# Altium PCB PCB1.PcbDoc
Units mil, origin at the board's own origin, x right, y up, seen from the top; angles counter-clockwise.
Board outline 2425 x 2875 mil, 2 copper layers (Top Layer, Bottom Layer); 20 components, 17 nets, 89 pads, 0 vias.
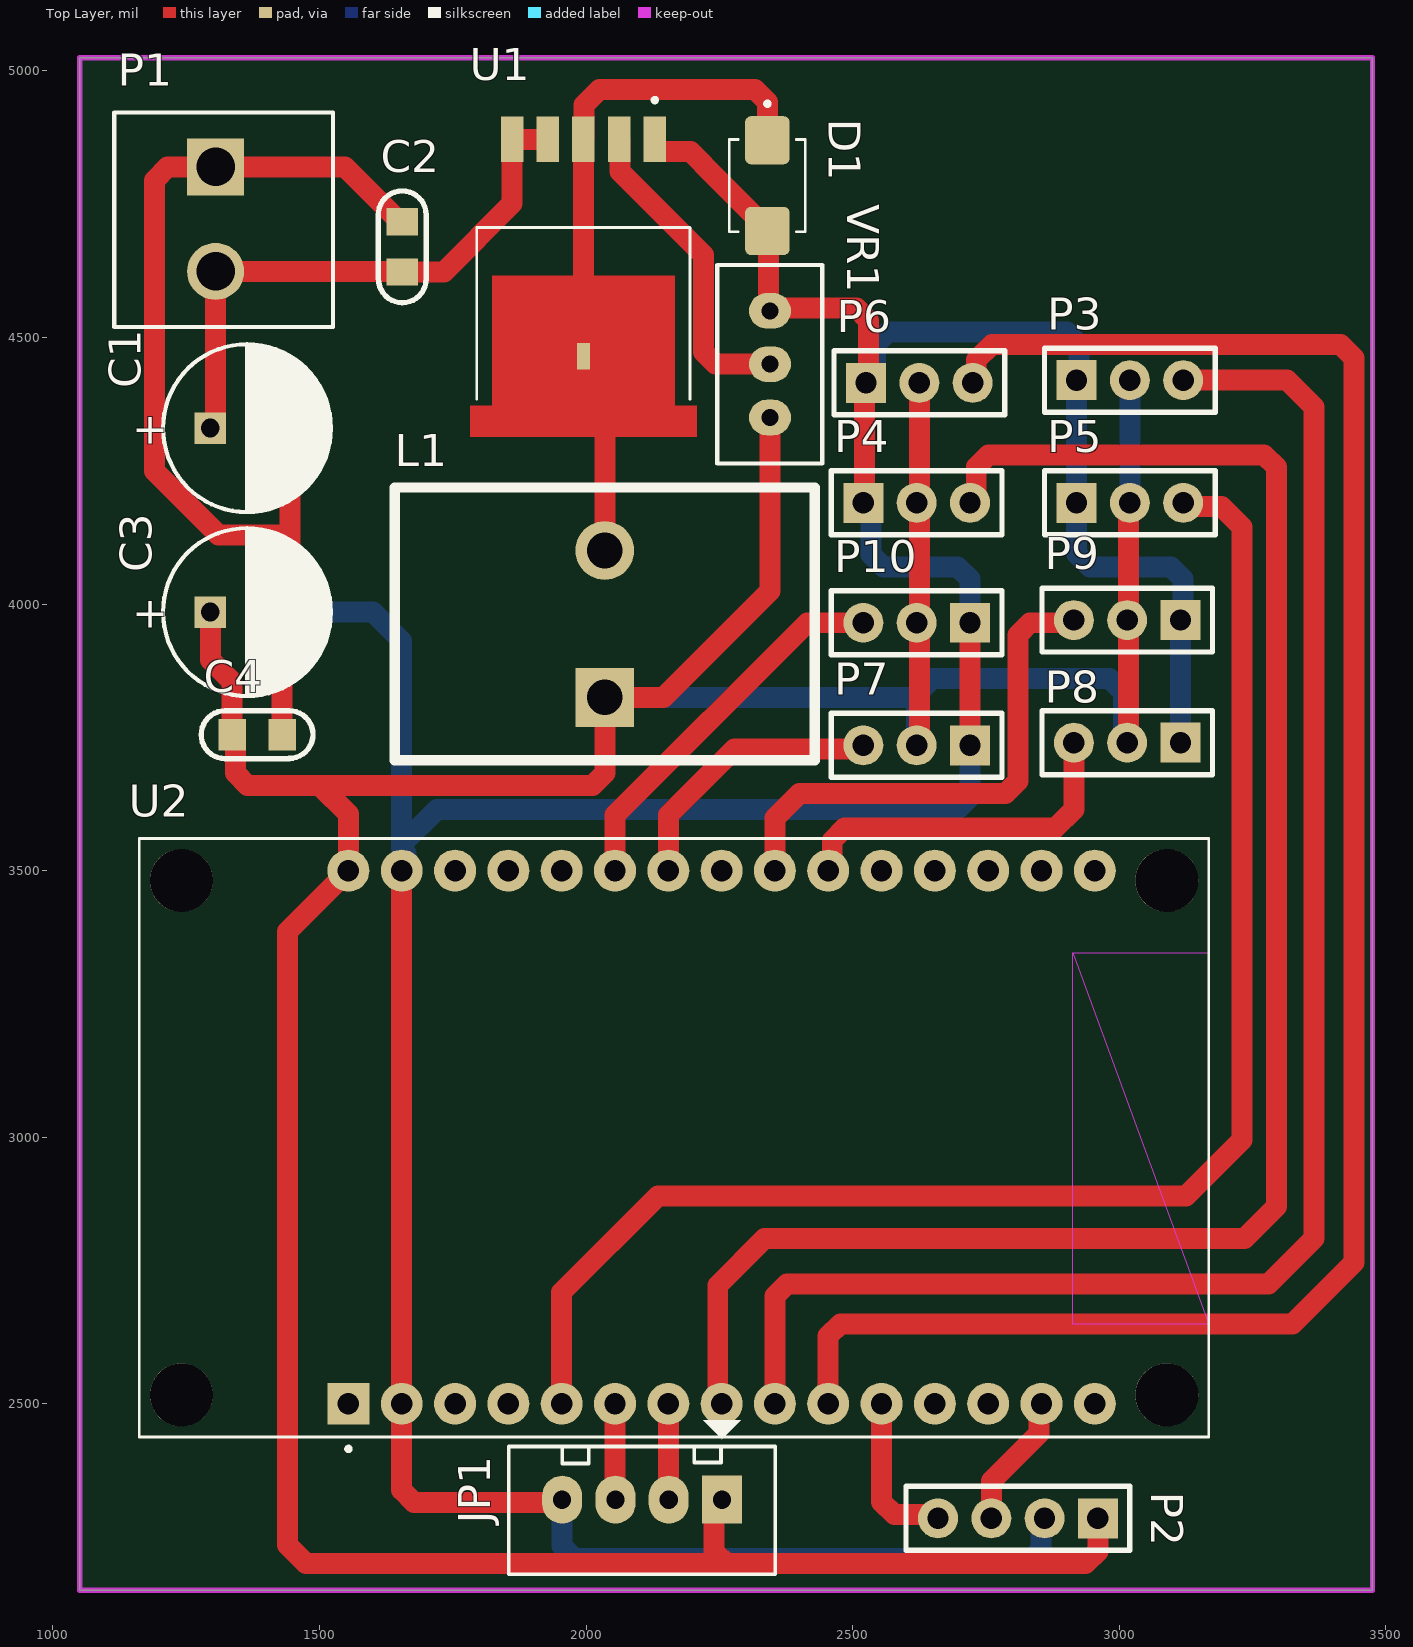
[diagram p0: Top Layer view]
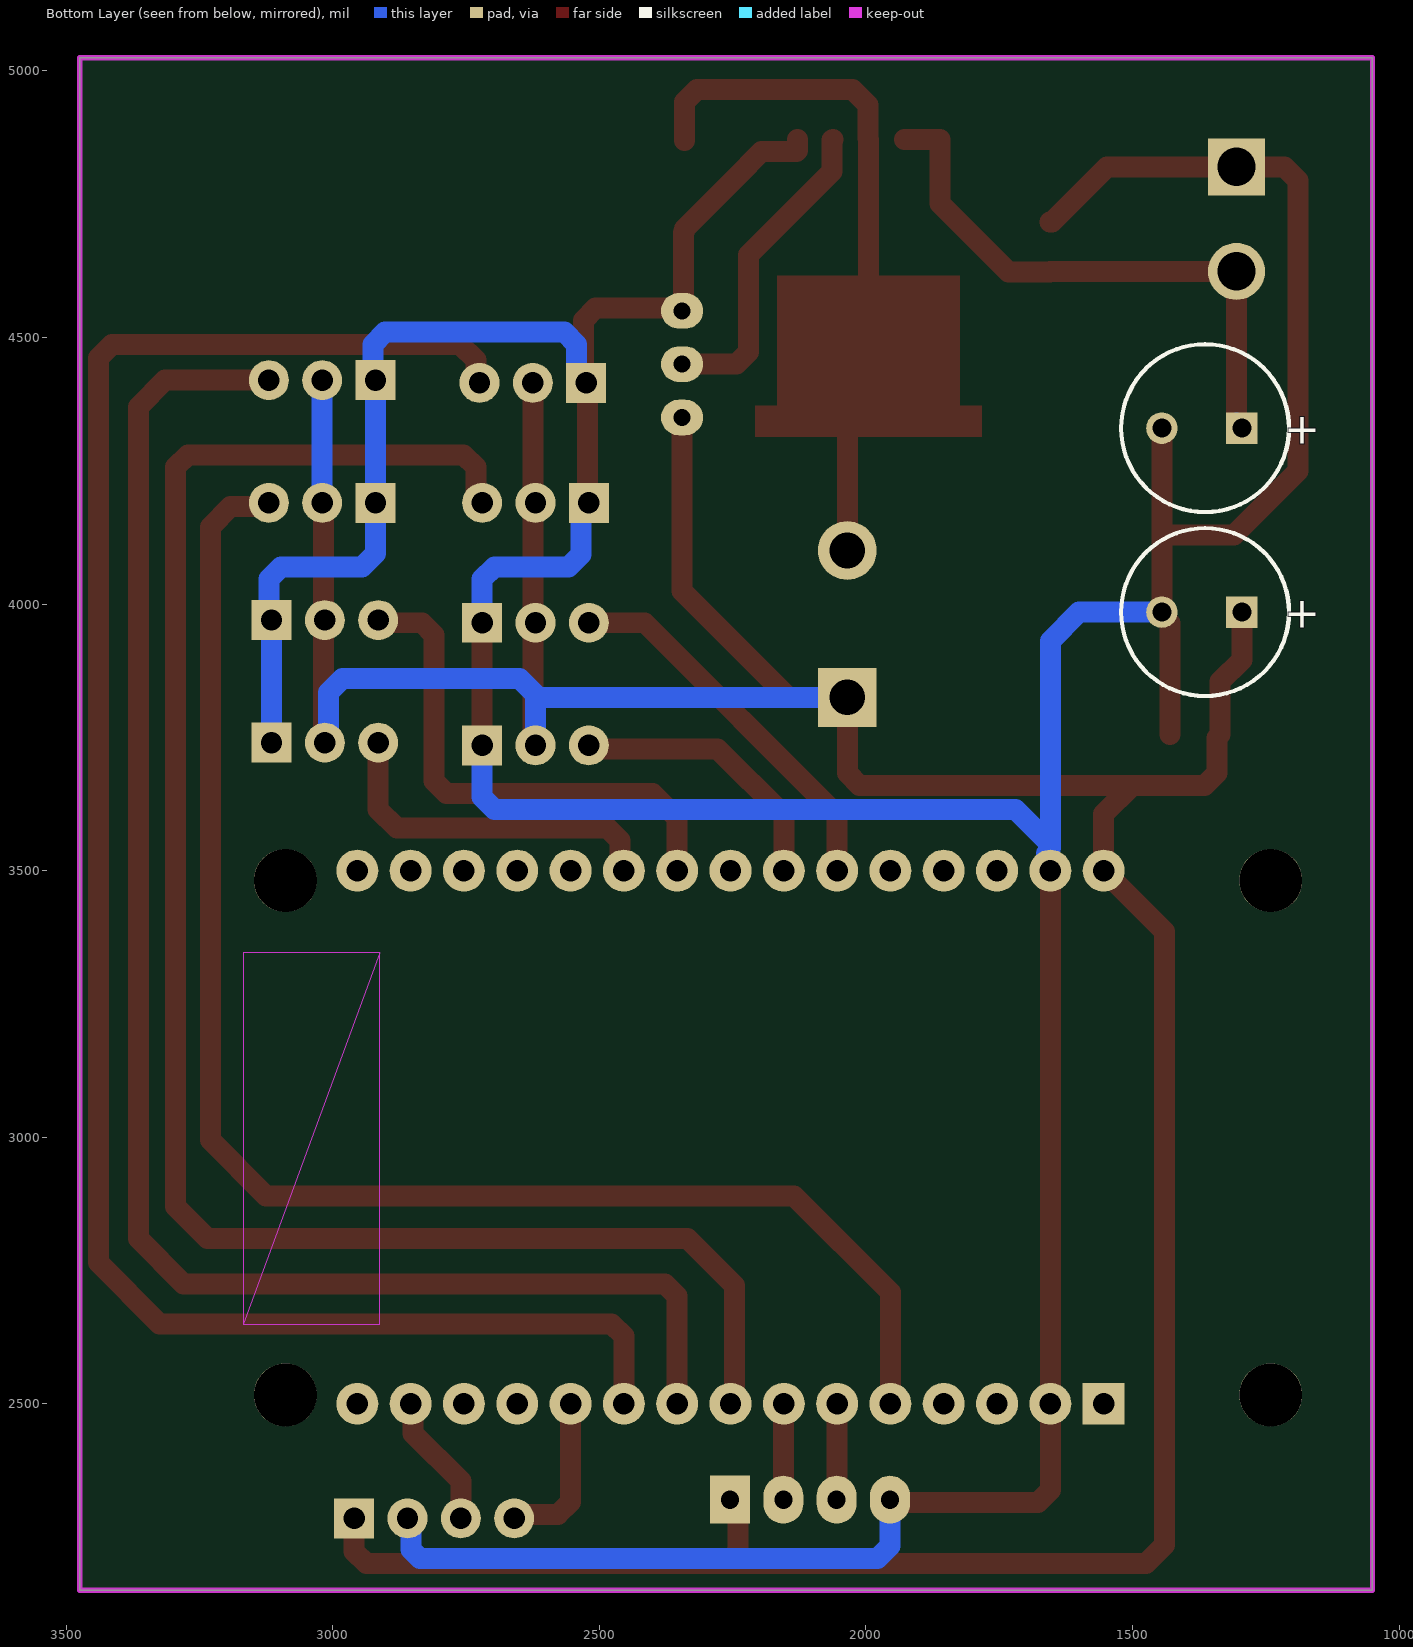
[diagram p1: Bottom Layer view, seen from below]
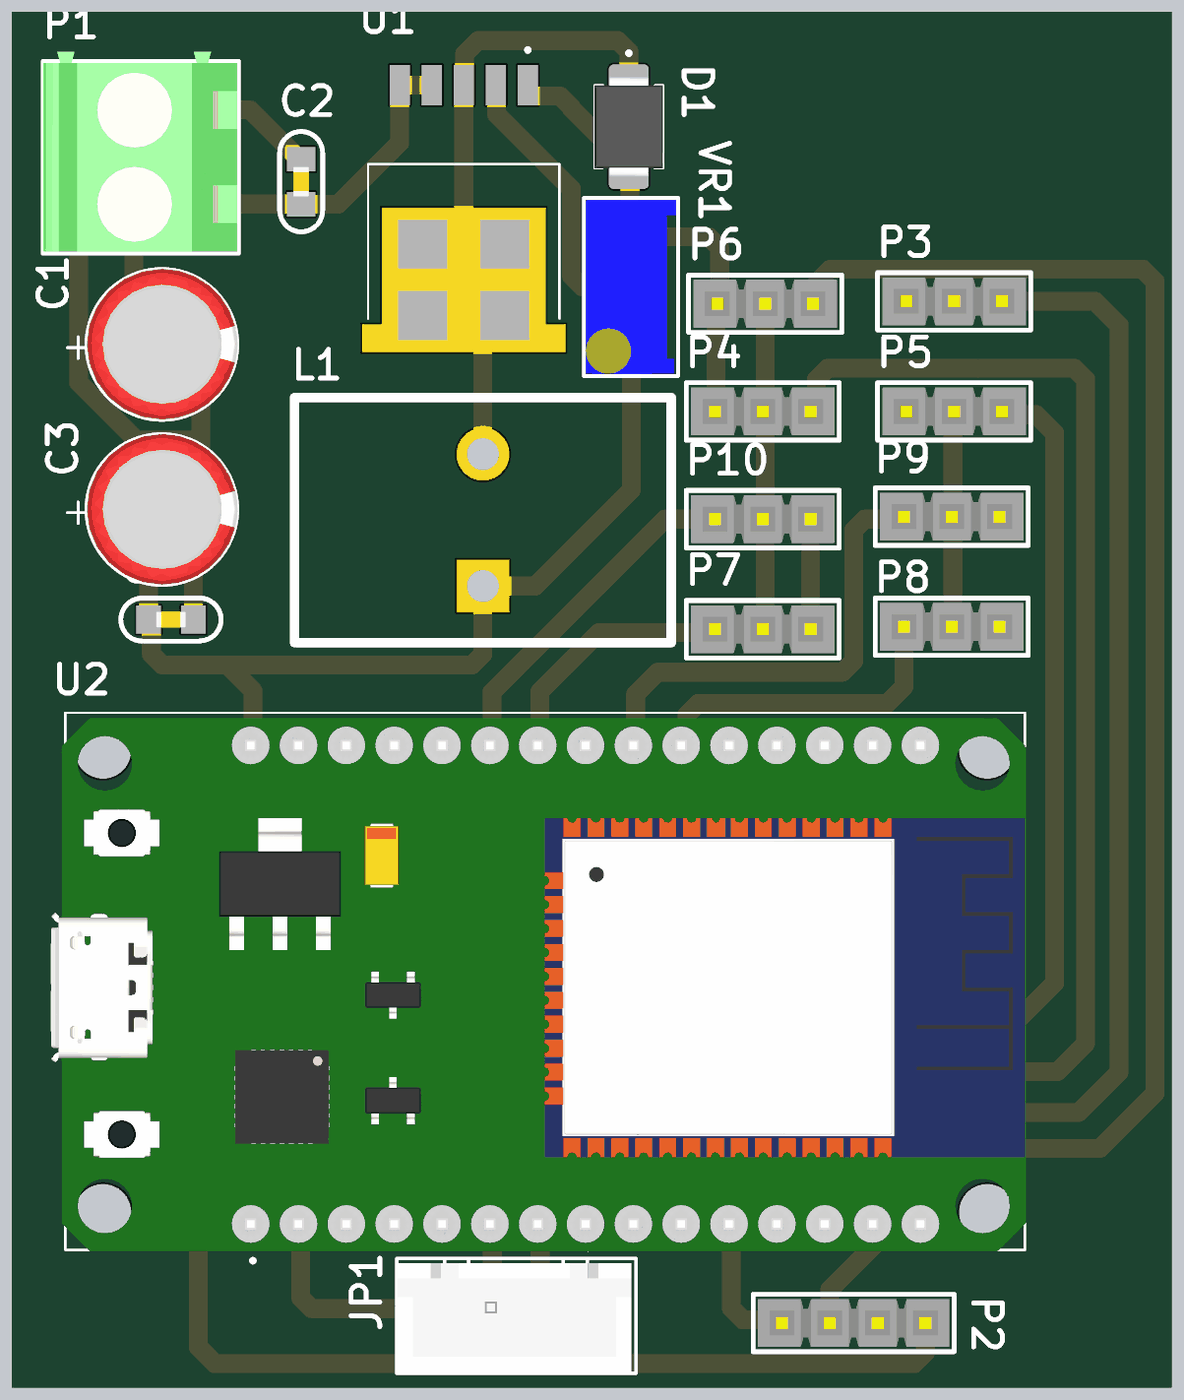
[diagram p2: 3D render of the assembled board from above, using the file's embedded part models]

## Layer stack, top to bottom
Top Solder: solder mask 0.4, Solder Resist, Dk 3.5
Top Layer: signal copper 1.4
Dielectric 1: dielectric 12.6, FR-4, Dk 4.8
Bottom Layer: signal copper 1.4
Bottom Solder: solder mask 0.4, Solder Resist, Dk 3.5

## Board outline
1050,2150 1050,5025 3475,5025 3475,2150

## Design rules (kind name [scope] priority, off if disabled: settings)
Clearance [All] p1: gap=10 ignorepadtopadclearanceinfootprint=FALSE
PolygonConnect [All] p1: connectstyle=Relief reliefconductorwidth=10 reliefentries=4 polygonreliefangle="90 Angle" airgapwidth=10
RoutingVias [All] p1: holewidth=28 width=50 viastyle="Through Hole" minholewidth=28 minwidth=50 maxholewidth=28 maxwidth=50
SolderMaskExpansion [All] p1: expansion=4 istentingtop=FALSE
Width [All] p1: maxlimit=47.24 minlimit=39.37 preferedwidth=39.37 minimp=50.000000 maximp=50.000000 favimp=50.000000
30 further rules are at their usual default settings.

## Components (designator, comment, footprint, x,y, rotation, side; value= is the part's Value field where it differs from the comment)
C1 "Cap Pol" "RADIAL E" 1295,4330 r0 top value=470
C2 "Cap Non-pol" C-NP-0805 1655,4670 r270 top value=0.1
C3 "Cap Pol" "RADIAL E" 1295,3985 r0 top value=470
C4 "Cap Non-pol" C-NP-0805 1383,3755 r0 top value=0.1
D1 "SS24" DIOM5336X265N 2340,4785 r270 top
JP1 "JP4" CON4 2255,2320 r180 top value="Connector 4"
L1 "33" "Cuon day ferrite" 2035,4100.59 r270 top
P1 "Header 2" "TBlock 2" 1305,4820 r270 top
P2 "Header 4" "Header 4" 2960,2285 r180 top
P3 "Header 3" "Header 3" 2920,4420 r0 top
P4 "Header 3" "Header 3" 2520,4190 r0 top
P5 "Header 3" "Header 3" 2920,4190 r0 top
P6 "Header 3" "Header 3" 2525,4415 r0 top
P7 "Header 3" "Header 3" 2720,3735 r180 top
P8 "Header 3" "Header 3" 3115,3740 r180 top
P9 "Header 3" "Header 3" 3115,3970 r180 top
P10 "Header 3" "Header 3" 2720,3965 r180 top
U1 "XL4015" CONV_XL4015 1995,4465 r270 top
U2 "ESP32-DEVKIT-V1" MODULE_ESP32_DEVKIT_V1 2165,3000 r90 top
VR1 "Variable Resistor" VRes-R 2345,4350 r90 top value=10k

## Footprints (in the part's own frame and the unit in brackets; to place one, negate y for a bottom-side part, rotate by r counter-clockwise, add the part's x,y. Pads: shape width x height; smd on the part's side, far side on the other; paste and mask are expansions set on the pad)
C-NP-0805 [mm] "Chip Capacitor; Non-polarized; Body 2.0 x 1.3 mm (LxW typ) [2012]"
  rect 1.3x1.5 smd: 1(-1.194,0) 2(1.194,0)
  silkscreen extent -2.67,-1.14 2.66,1.14, body extent -0.8,-0.43 0.8,0.43, height 0.79
CON4 [mil] "CON4"
  rect 75x90 hole 34: 1(0,0)
  oval 75x90 hole 34: 2(100,0) 3(200,0) 4(300,0)
  silkscreen extent -100,-150 400,140, body extent -90,-90 398,136, height 276
CONV_XL4015 [mm]
  rect 2.16x1.07 smd: 1(-10.335,3.4) 2(-10.335,1.7) 3(-10.335,0) 4(-10.335,-1.7) 5(-10.335,-3.4)
  rect 1.27x0.635 smd paste-2 mask+0: 3.1(0,0)
  Top Layer region: 3.835,-5.4 2.365,-5.4 2.365,-4.35 -3.835,-4.35 -3.835,4.35 2.365,4.35 2.365,5.4 3.835,5.4
  silkscreen extent -12.3,-5.08 2.05,5.08
"Cuon day ferrite" [mm]
  round 2.8 hole 1.7: 1(0,0)
  rect 2.8x2.8 hole 1.7: 2(7,0)
  silkscreen extent -3,-10 10,10
DIOM5336X265N [mm]
  rrect25% 2.29x2.12 smd: A(2.16,0) C(-2.16,0)
  silkscreen extent -4,-1.81 2.2,1.81, body extent -2.67,-1.81 2.67,1.81, height 2.65
"Header 3" [mil] "Connector; Header; 3 Position; Solder Pad 35mil"
  rect 75x75 hole 40: 1(0,0)
  round 75 hole 40: 2(100,0) 3(200,0)
  silkscreen extent -60,-60 260,60, body extent -50,-50 250,50, height 83
"Header 4" [mil] "Connector; Header; 4 Position; Solder Pad 35mil"
  rect 75x75 hole 40: 1(0,0)
  round 75 hole 40: 2(100,0) 3(200,0) 4(300,0)
  silkscreen extent -60,-60 360,60, body extent -50,-50 350,50, height 330
MODULE_ESP32_DEVKIT_V1 [mm]
  rect 2x2 / inner round 2 / far side rect 2x2 hole 1.02: 1(-12.7,15.515)
  round 2 hole 1.02: 2(-12.7,12.975) 3(-12.7,10.435) 4(-12.7,7.895) 5(-12.7,5.355) 6(-12.7,2.815) 7(-12.7,0.275) 8(-12.7,-2.265) 9(-12.7,-4.805) 10(-12.7,-7.345) 11(-12.7,-9.885) 12(-12.7,-12.425) 13(-12.7,-14.965) 14(-12.7,-17.505) 15(-12.7,-20.045) 16(12.7,-20.045) 17(12.7,-17.505) 18(12.7,-14.965) 19(12.7,-12.425) 20(12.7,-9.885) 21(12.7,-7.345) 22(12.7,-4.805) 23(12.7,-2.265) 24(12.7,0.275) 25(12.7,2.815) 26(12.7,5.355) 27(12.7,7.895) 28(12.7,10.435) 29(12.7,12.975) 30(12.7,15.515)
  round 3 hole 3 unplated: ""(-12.28,23.475) ""(-12.28,-23.475) ""(12.23,23.475) ""(12.23,-23.475)
  Keep-Out Layer region: -8.91,-25.475 -8.91,-18.985 8.78,-18.985
  Keep-Out Layer region: 8.78,-25.475 -8.91,-25.475 -8.91,-18.985 8.78,-18.985
  silkscreen extent -14.95,-25.48 14.23,25.48, body extent -14.35,-25.53 13.95,26.24, height 4.7
"RADIAL E" [mm] "Capacitor, Electrolytic, Radial; Body 8 x 10.5 mm (Dia.xH typ); Pin Spacing 3.5 mm (typ)"
  rect 1.5x1.5 hole 0.9: 1(0,0)
  round 1.5 hole 0.9: 2(3.81,0)
  silkscreen extent -2.25,-4 5.75,4, body extent -2.24,-3.99 5.76,4.01, height 11.74
"TBlock 2" [mil] "Connector; Terminal; 2 Positions; Solder Pad 35mil"
  rect 107x107 hole 72: 1(0,0)
  round 107 hole 72: 2(196,0)
  silkscreen extent -102,-190 300,220, body extent -122,-189 296,217, height 560
VRes-R [mil] "Potentiometer; 3 Leads; Rectangle; Solder pad 35mil"
  oval 67x79 hole 32: 1(0,0) 2(100,0) 3(200,0)
  silkscreen extent -86,-98 286,99, body extent -81,-94 281,95, height 474

## Part data
C1 C3: "Polarized Capacitor", LatestRevisionDate=17-Jul-2002, LatestRevisionNote="Re-released for DXP Platform.", PackageReference=POLAR0.8, Published=8-Jun-2000, Publisher="Altium Limited"
C2 C4: "Non-polarized Capacitor", LatestRevisionDate=17-Jul-2002, LatestRevisionNote="Re-released for DXP Platform.", PackageReference=RAD-0.3, Published=8-Jun-2000, Publisher="Altium Limited"
D1: "Diode Schottky 40V 2A Surface Mount DO-214AA (SMB)", Package="DO-214AA ON Semiconductor", Availability="In Stock", Check_prices=https://www.snapeda.com/parts/SS24/Onsemi/view-part/?ref=eda, MF="ON Semiconductor", MP=SS24, Price=None, SnapEDA_Link=https://www.snapeda.com/parts/SS24/Onsemi/view-part/?ref=snap
JP1: library part Con4, "Connector 4"
L1: library part "Inductor Ferrite", "Cuon Cam L", Code_IEC=1005, Code_JEITA=0402, ComponentLink1Description="Digikey Part Link", ComponentLink2Description="Open Datasheet", ComponentLink2URL=H:\LIBRARY\LIBRARY.Datasheet\, LatestRevisionDate=17-Jul-2002, LatestRevisionNote="Re-released for DXP Platform.", PackageReference=0402-A, Published=8-Jun-2000, Publisher="Altium Limited", Vendor=Digikey
P1: "Header, 2-Pin", LatestRevisionDate=17-Jul-2002, LatestRevisionNote="Re-released for DXP Platform.", Publisher="Altium Limited"
P2: "Header, 4-Pin", LatestRevisionDate=17-Jul-2002, LatestRevisionNote="Re-released for DXP Platform.", Publisher="Altium Limited"
P3 P4 P5 P6 P7 P8 P9 P10: "Header, 3-Pin", LatestRevisionDate=17-Jul-2002, LatestRevisionNote="Re-released for DXP Platform.", Publisher="Altium Limited"
U1: "5A 180KHz 36V Buck DC to DC Converter", Package=None, Availability=Unavailable, MP=XL4015, Price=None
U2: "Dual core, Wi-Fi: 2.4 GHz up to 150 Mbits/s,BLE (Bluetooth Low Energy) and legacy Bluetooth, 32 bits, Up to 240 MHz", Package=None, Availability="Not in stock", Check_prices=https://www.snapeda.com/parts/ESP32-DEVKIT-V1/Do+it/view-part/?ref=eda, MF="Do it", MP=ESP32-DEVKIT-V1, Price=None, SnapEDA_Link=https://www.snapeda.com/parts/ESP32-DEVKIT-V1/Do+it/view-part/?ref=snap
VR1: LatestRevisionDate=17-Jul-2002, LatestRevisionNote="Re-released for DXP Platform.", PackageReference=AXIAL-0.3, Published=8-Jun-2000, Publisher="Altium Limited"

## Nets (pads, with @x,y where several pads share a name; then routed paths per layer and width w, separated by ;. In a path a pad name is that pad's centre, name@x,y a point inside that pad or via, vN(x,y) a via of type N, cw(c..) or ccw(c..) an arc to the next point about the centre after c; other vN are vias at no path point)
+5: C3.1 C4.1 JP1.1 L1.2 P2.1 P3.2 P4.2 P5.2 P6.2 P7.2 P8.2 P9.2 P10.2 U2.30 VR1.1 | length 7689.7
  Top Layer w39.37: C3.1 1295,3895.42 1336,3854.42 C4.1 1341.91,3749.09 1341.91,3683.06 1364.97,3660 1500,3660 ; JP1.1 2240,2305 2240,2223.06 2263.06,2200 ; VR1.1 2345,4025 2145,3825 L1.2 2035,3683.06 2011.94,3660 1500,3660 ; P7.2 2625,3740 P6.2 P6.2@2630,4420 ; P2.1 2960,2223.06 2936.94,2200 2263.06,2200 ; P8.2 3017.5,3742.5 P9.2@3017.5,3967.5 ; P9.2 3017.5,3972.5 3017.5,4187.5 P5.2 ; 1500,3660 1554.17,3605.83 U2.30 1440,3385.83 1440,2235 1475,2200 2263.06,2200
  Bottom Layer w39.37: L1.2 2615,3825 2620,3830 ; P7.2 2620,3830 ; P8.2 3008.18,3746.82 3008.18,3833.75 2981.94,3860 2650,3860 2620,3830 ; P5.2 P3.2
ECHO: JP1.3 U2.6 | length 180.3
  Top Layer w39.37: U2.6 2054.59,2499.59 2054.59,2320.41 JP1.3
GND: C1.2 C2.1 C3.2 C4.2 D1.A JP1.4 P1.1 P2.2 P3.1 P4.1 P5.1 P6.1 P7.1 P8.1 P9.1 P10.1 U1.1 U2.2 U2.29 VR1.3 | length 9326.1
  Top Layer w39.37: C4.2 C3.2@1430,3964.67 ; C3.2 1445,4130 ; C1.2 1445,4130 ; U2.29 U2.2 1654.17,2338.06 1677.24,2315 1950,2315 JP1.4 ; C2.1 1651.06,4717 1548.06,4820 P1.1 1215,4820 1190,4795 1190,4250 1310,4130 1445,4130 ; U1.1 2128.86,4850.43 2130.24,4849.06 2195.94,4849.06 2220,4825 2220,4823.31 2340,4703.31 D1.A 2342.5,4697.46 2342.5,4552.5 VR1.3 2350,4555 2506.94,4555 2530,4531.94 2530,4420 P6.1 2522.5,4412.5 2522.5,4192.5 P4.1 ; P7.1 P10.1
  Bottom Layer w39.37: C3.2 1600,3985 1654.17,3930.83 1654.17,3553.11 ; U2.29 1654.17,3510.65 1661.71,3518.19 U2.29@1661.71,3532.58 ; 1654.17,3542.75 1654.17,3549.17 1720,3615 2696.94,3615 2720,3638.06 P7.1 ; JP1.4 1955,2233.06 1978.06,2210 2836.94,2210 2853.18,2226.25 2853.18,2278.18 P2.2 ; P4.1 2534.62,4175.38 2534.62,4093.44 2558.06,4070 2696.94,4070 2720,4046.94 P10.1 ; P6.1 2542.81,4432.81 2542.81,4486.94 2565.88,4510 2901.94,4510 2925,4486.94 2925,4425 P3.1 P5.1 2920,4095 2945,4070 3096.94,4070 3120,4046.94 3120,3975 P9.1 P8.1
NetD1_C: D1.C L1.1 U1.3 U1.3.1 | length 1265.7
  Top Layer w39.37: U1.3.1 1990,4470 1990,4520 1995,4525 U1.3 1996.38,4873.27 1996.38,4936.38 2025,4965 2316.94,4965 2340,4941.94 D1.C ; 2015,4445 2035,4425 L1.1
NetU1_2: U1.2 VR1.2 | length 598.9
  Top Layer w39.37: U1.2 2063.31,4870.51 2063.31,4811.69 2220,4655 2220,4473.06 2243.06,4450 VR1.2
SCL: P2.3 U2.14 | length 254
  Top Layer w39.37: P2.3 2760,2355 2849.36,2444.36 2849.36,2495.19 U2.14
SDA: P2.4 U2.11 | length 302.8
  Top Layer w39.37: U2.11 2554.17,2315.83 2578.18,2291.82 2653.18,2291.82 P2.4
SG1: P3.3 U2.9 | length 3083.2
  Top Layer w39.37: U2.9 2354.17,2701.94 2377.24,2725 3280,2725 3365,2810 3365,4370 3315,4420 P3.3
SG2: P4.3 U2.8 | length 3366.8
  Top Layer w39.37: U2.8@2246.93,2503.41 2246.93,2721.93 2335,2810 3235,2810 3295,2870 3295,4256.94 3271.94,4280 2755,4280 2731.82,4256.82 2731.82,4196.82 P4.3@2725,4190
SG3: P5.3 U2.5 | length 2882
  Top Layer w39.37: U2.5 1954.17,2709.17 2135,2890 3125,2890 3230,2995 3230,4145 3191.82,4183.18 3126.82,4183.18 P5.3
SG4: P6.3 U2.10 | length 3643.4
  Top Layer w39.37: U2.10 2454.17,2626.94 2477.24,2650 3325,2650 3440,2765 3440,4461.94 3414.75,4487.19 2761.12,4487.19 2731.82,4457.88 2731.82,4421.82 P6.3
SG5: P7.3 U2.24 | length 521.8
  Top Layer w39.37: U2.24 2154.17,3604.17 2278.18,3728.18 P7.3@2520.44,3728.18
SG6: P8.3 U2.21 | length 662.3
  Top Layer w39.37: U2.21 2461.71,3507.53 2461.71,3556.71 2485,3580 2880,3580 2915,3615 P8.3
SG7: P9.3 U2.22 | length 967
  Top Layer w39.37: U2.22 2354.17,3599.17 2400,3645 2786.94,3645 2810,3668.06 2810,3941.94 2833.06,3965 P9.3@2910,3965
SG8: P10.3 U2.25 | length 724.5
  Top Layer w39.37: U2.25 2054.17,3604.17 2415,3965 P10.3@2525,3965
TRIG: JP1.2 U2.7 | length 180.3
  Top Layer w39.37: U2.7 2154.59,2499.59 2154.59,2320.41 JP1.2
VCC: C1.1 C2.2 P1.2 U1.4 U1.5 | length 1109.6
  Top Layer w39.37: C1.1 1305,4340 P1.2 1305.5,4623.5 1654.5,4623.5 C2.2 1733,4623 1861.14,4751.14 U1.5 U1.4
  Bottom Layer w39.37: C1.1 C1.1@1305,4340
pads on no net: U2. U2.1 U2.3 U2.4 U2.12 U2.13 U2.15 U2.16 U2.17 U2.18 U2.19 U2.20 U2.23 U2.26 U2.27 U2.28

## Keep-outs
Keep-Out Layer:
  the board outline again, w10

## Text inside footprints (layer, text, board x,y; h text height)
C1: Top Overlay "+" at 1148.35,4300.47 h59.06; Bottom Overlay "+" at 1148.35,4300.47 h59.06
C3: Top Overlay "+" at 1148.35,3955.47 h59.06; Bottom Overlay "+" at 1148.35,3955.47 h59.06